# Altium PCB SLT.PcbDoc (part 8 of 8)
Units mm, origin at the board's own origin, x right, y up, seen from the top; angles counter-clockwise.
Board outline 150 x 66 mm, 6 copper layers (L1 TOP, L2 GND 1, L3 SIGNAL, L4 PWR, L5 GND 2, L6 BOT), stack 1.598 mm thick; 797 components, 541 nets, 2680 pads, 2120 vias.
Unrouted connection lines stored in the file: 31.
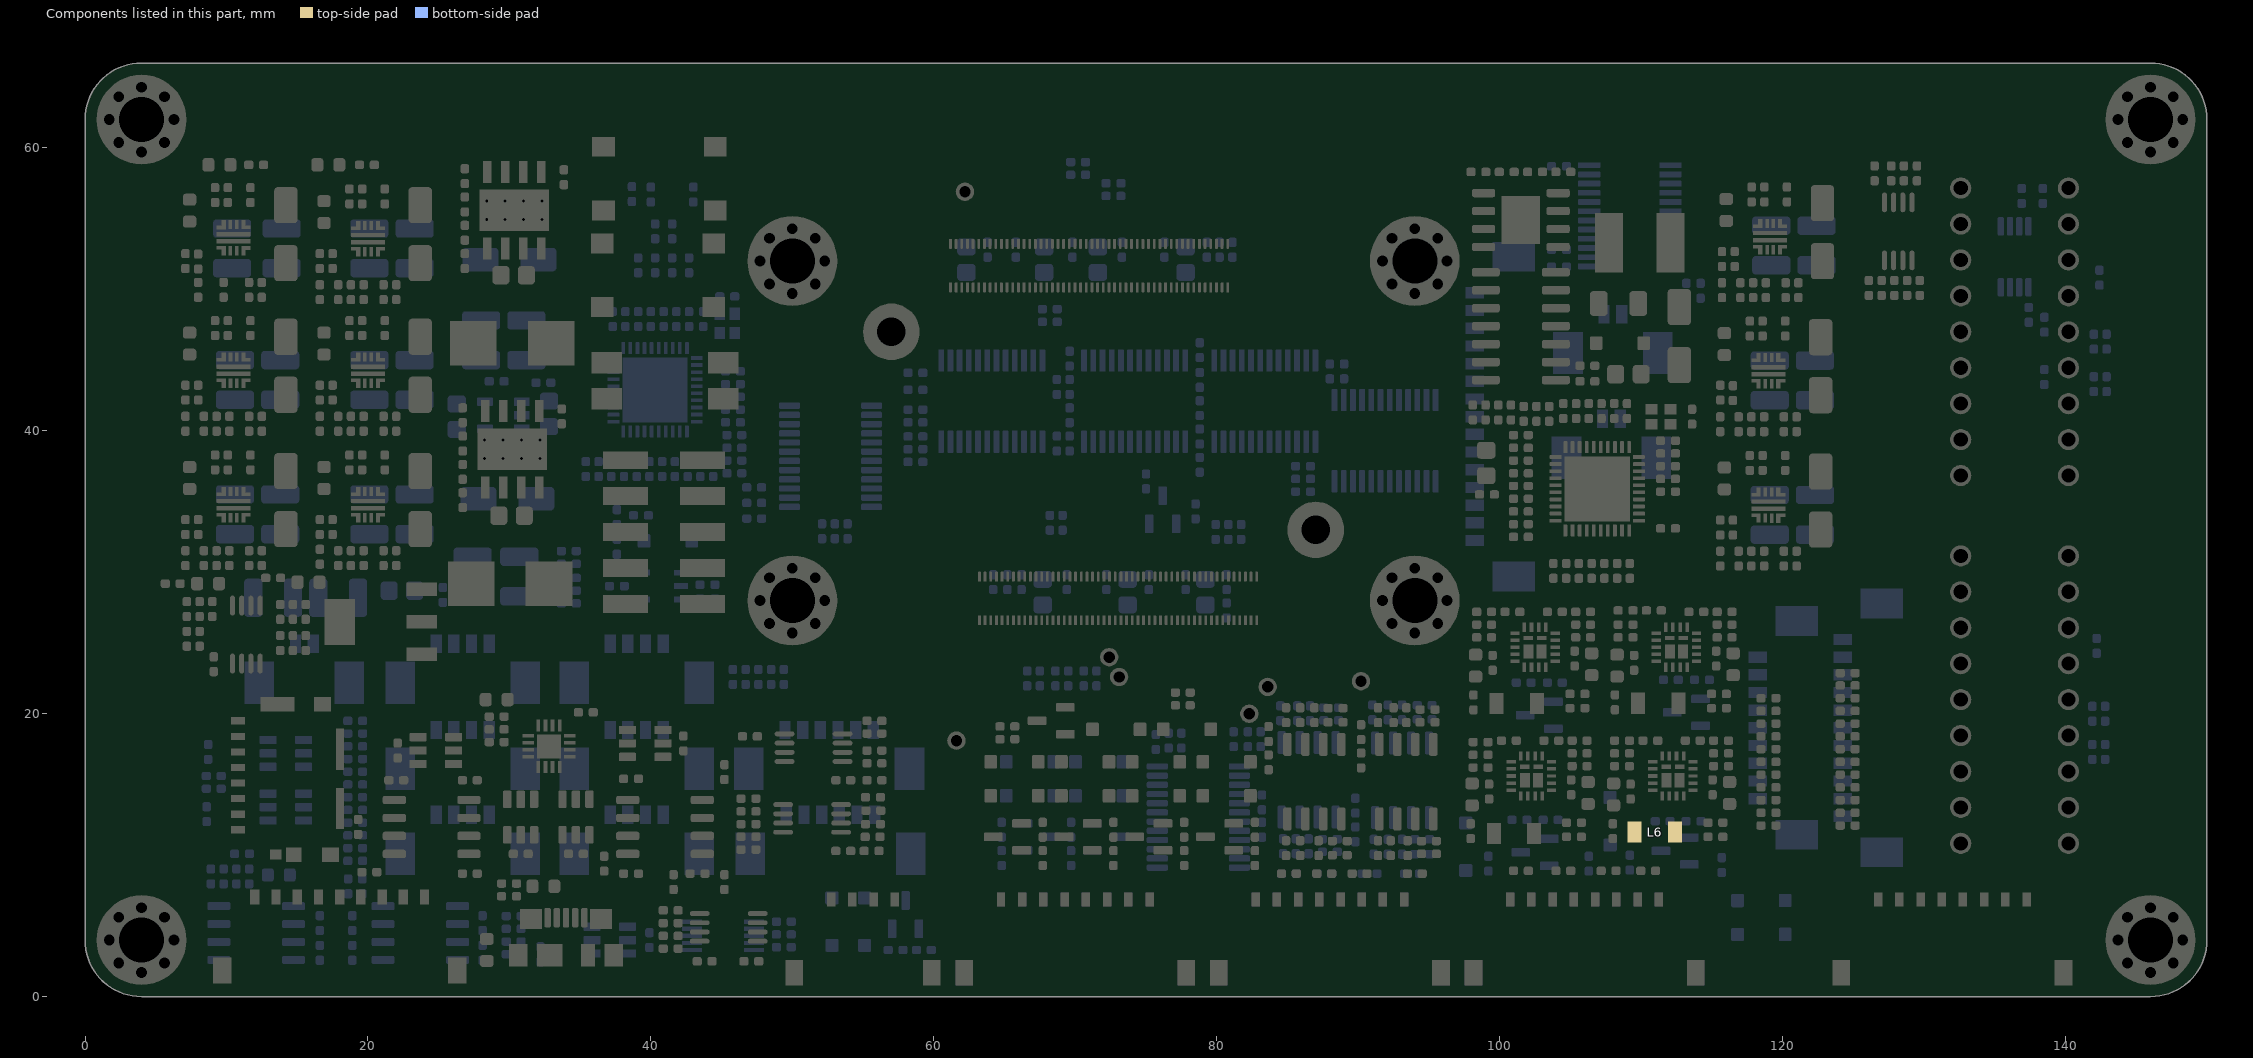
[diagram p12: the components of this part, seen from the top]

## Other copper (continued)
L6 BOT:
  region net GND: 0.5,7.5 0.5,4 ccw(c4,4) 4,0.5 146,0.5 ccw(c146,4) 149.5,4 149.5,62 ccw(c146,62) 146,65.5 4,65.5 ccw(c4,62) 0.5,62 0.5,11 6,11 6,60 144,60 144,1.516 6,1.516 6,7.5
  region net GND: 0.5,7.5 0.5,4 ccw(c4,4) 4,0.5 146,0.5 ccw(c146,4) 149.5,4 149.5,62 ccw(c146,62) 146,65.5 4,65.5 ccw(c4,62) 0.5,62 0.5,11 6,11 6,60 144,60 144,1.516 6,1.516 6,7.5
  region net GND: 118.2,55 118.2,54 123.5,54 123.6,54.1 123.6,55.8 123.3,56.1 120.8,56.1 120.5,55.8 120.5,55.2 120.3,55
  region net GND: 118.092,45.465 118.092,44.465 123.392,44.465 123.492,44.565 123.492,46.965 122.192,48.265 120.592,48.265 120.392,48.065 120.392,45.665 120.192,45.465
  region net GND: 117.8,35.9 117.8,34.9 123.1,34.9 123.2,35 123.2,37.4 121.9,38.7 120.3,38.7 120.1,38.5 120.1,36.1 119.9,35.9
  region net GND: 32.3,48.2 32.3,47.4 32.2,47.3 26.7,47.3 26.7,49 26.9,49.2 29.4,49.2 29.5,49.1 29.5,48.2
  region net GND: 29,52.6 29,50.3 28.8,50.1 26.7,50.1 26.5,50.3 26.5,52.4 26.7,52.6
  region net GND: 29,52.6 29,50.3 28.8,50.1 26.7,50.1 26.5,50.3 26.5,52.4 26.7,52.6
  region net GND: 19.1,54.8 19.1,53.8 24.4,53.8 24.5,53.9 24.5,56.3 23.2,57.6 21.6,57.6 21.4,57.4 21.4,55 21.2,54.8
  region net GND: 9.4,54.9 9.1,54.6 9.1,53.9 9.2,53.8 15,53.8 15.1,53.9 15.1,56.3 13.8,57.6 12.2,57.6 12,57.4 12,55 11.9,54.9
  region net GND: 19.1,45.5 19.1,44.5 24.4,44.5 24.5,44.6 24.5,45.8 22,48.3 21.6,48.3 21.4,48.1 21.4,45.7 21.2,45.5
  region net GND: 19.1,36 19.1,35 24.4,35 24.5,35.1 24.5,37.5 23.2,38.8 21.6,38.8 21.4,38.6 21.4,36.2 21.2,36
  region net GND: 9.6,45.5 9.6,44.5 14.9,44.5 15,44.6 15,47 13.7,48.3 12.1,48.3 11.9,48.1 11.9,45.7 11.7,45.5
  region net GND: 9.6,36 9.6,35 14.9,35 15,35.1 15,37.5 13.7,38.8 12.1,38.8 11.9,38.6 11.9,36.2 11.7,36
  region net GND: 31.8,31.5 31.8,30.7 31.7,30.6 26.2,30.6 26.2,32.3 26.4,32.5 28.9,32.5 29,32.4 29,31.5
  region net GND: 28.85,35.7 28.85,33.4 28.65,33.2 26.55,33.2 26.35,33.4 26.35,35.5 26.55,35.7
  region net GND: 28.85,35.7 28.85,33.4 28.65,33.2 26.55,33.2 26.35,33.4 26.35,35.5 26.55,35.7
  region net GND: 0.5,11.5 6,11.5 6,7 0.5,7
  region net GND: 0.5,11.5 6,11.5 6,7 0.5,7
  region net NTC1+: 23.1,31.044 23.1,30.1 22.6,29.6 22.6,28.5 22.8,28.3 24.1,28.3 24.3,28.5 24.3,30 24.81,30.51
  region net +12V_IN: 15.2,25.5 8.3,25.5 8.3,24.8 15.2,24.8
  region net +3.3V: 14.3,29.4 14.3,28.9 14.3,27.2 15.9,27.2 18.2,24.9 20.2,24.9 21,25.7 21,26.1 20.6,26.5 18.4,26.5 16.9,28 16.9,29.296 16.896,29.3 14.308,29.408
  region net +5V_OUT: 29,43.9 28.9,43.8 28.9,43.2 28.8,43.1 27.5,43.1 26.7,43.9 26.7,45.5 32.3,45.5 32.3,44.4 29.5,44.4
  region net +5V_SOM: 25,28 25,27 25.4,26.6 31.6,26.6 32,27 32,28.7 31.9,28.8 26.3,28.8 26.1,28.6 26.1,28
  region net +12V_Laser: 117.8,32.1 117.8,33.1 123.5,33.1 123.5,30.4 123.4,30.3 121.9,30.3 121.8,30.4 121.8,31.7 121.4,32.1
  region net +12V_Photo: 118.092,41.665 118.092,42.665 123.792,42.665 123.792,39.965 123.692,39.865 122.192,39.865 122.092,39.965 122.092,41.265 121.692,41.665
  region net +5V_CAM: 118.2,51.2 118.2,52.2 123.9,52.2 123.9,49.5 123.8,49.4 122.3,49.4 122.2,49.5 122.2,50.8 121.8,51.2
  region net +5V_HD4: 19.1,51 19.1,52 24.8,52 24.8,49.3 24.7,49.2 23.2,49.2 23.1,49.3 23.1,50.6 22.7,51
  region net +5V_TEC: 19.1,41.7 19.1,42.7 24.8,42.7 24.8,40 24.7,39.9 23.2,39.9 23.1,40 23.1,41.3 22.7,41.7
  region net NTC1+: 19.1,32.2 19.1,33.2 24.8,33.2 24.8,30.5 24.7,30.4 23.2,30.4 23.1,30.5 23.1,31.8 22.7,32.2
  region net HEATER_A_1: 9.6,32.2 9.6,33.2 15.3,33.2 15.3,30.5 15.2,30.4 13.7,30.4 13.6,30.5 13.6,31.8 13.2,32.2
  region net +12V_Solenoid: 9.6,41.7 9.6,42.7 15.3,42.7 15.3,40 15.2,39.9 13.7,39.9 13.6,40 13.6,41.3 13.2,41.7
  region net +12V: 9.2,51 9.2,52 15.2,52 15.2,49.4 15,49.2 14.2,49.2 14,49.4 14,50.3 13.3,51
  region net NetC28_1: 33.85,35.7 33.85,33.9 33.65,33.7 31.75,33.7 31.55,33.9 31.55,35.9 33.65,35.9
  region net NetC1_1: 34,52.6 34,50.8 33.8,50.6 31.9,50.6 31.7,50.8 31.7,52.8 33.8,52.8
  region net NetC28_1: 33.85,35.7 33.85,33.9 33.65,33.7 31.75,33.7 31.55,33.9 31.55,35.9 33.65,35.9
  region net NetC1_1: 34,52.6 34,50.8 33.8,50.6 31.9,50.6 31.7,50.8 31.7,52.8 33.8,52.8

## Silkscreen, mask and mechanical layers (free items; w line width, h text height)
Top Overlay:
  lines w0.15: 57,44.6 57,26 87,26 87,30.5 ; 57,49.3 57,54 87,54 87,35.6 ; 69.5,28.8 69.5,28.2 80.5,28.2 80.5,28.8 ; 69.5,30.9 69.5,39.2 80.5,39.2 80.5,30.9
Top Solder:
  region: 0.5,7.5 0.5,4 ccw(c4,4) 4,0.5 146,0.5 ccw(c146,4) 149.5,4 149.5,62 ccw(c146,62) 146,65.5 4,65.5 ccw(c4,62) 0.5,62 0.5,11 6,11 6,60 144,60 144,1.516 6,1.516 6,7.5
  region: 47.5,61 52.5,61 52.5,25.5 52,25 48,25 47.5,25.5
  region: 91.5,61 96.5,61 96.5,25.5 96,25 92,25 91.5,25.5
  region: 0.5,11.5 6,11.5 6,7 0.5,7
Bottom Solder:
  region: 0.5,7.5 0.5,4 ccw(c4,4) 4,0.5 146,0.5 ccw(c146,4) 149.5,4 149.5,62 ccw(c146,62) 146,65.5 4,65.5 ccw(c4,62) 0.5,62 0.5,11 6,11 6,60 144,60 144,1.516 6,1.516 6,7.5
  region: 0.5,11.5 6,11.5 6,7 0.5,7

## Text inside footprints (layer, text, board x,y; h text height)
J21: Top Assembly "*" at 10.18,14.918 h1.27 r270
SW1: Top Assembly "1" at 34.837,52.956 h0.89; Top Assembly "2" at 34.84,48.455 h0.89; Top Assembly "3" at 44.693,51.177 h0.89; Top Assembly "4" at 45.709,47.439 h0.89
SW2: Top Assembly "4" at 45.809,54.264 h0.89; Top Assembly "3" at 44.793,58.002 h0.89; Top Assembly "2" at 34.94,55.28 h0.89; Top Assembly "1" at 34.937,59.781 h0.89
U31: Mechanical 13 "RefDes2" at 43.023,28.39 h1.27; Mechanical 13 "*" at 41.714,29.152 h1.27